# Altium PCB Protoboard.PcbDoc
Units mil, origin at the board's own origin, x right, y up, seen from the top; angles counter-clockwise.
Board outline 2900 x 3700 mil, 2 copper layers (Top Layer, Bottom Layer); 3 components, 87 nets, 543 pads, 10 vias.
Unrouted connection lines stored in the file: 84.
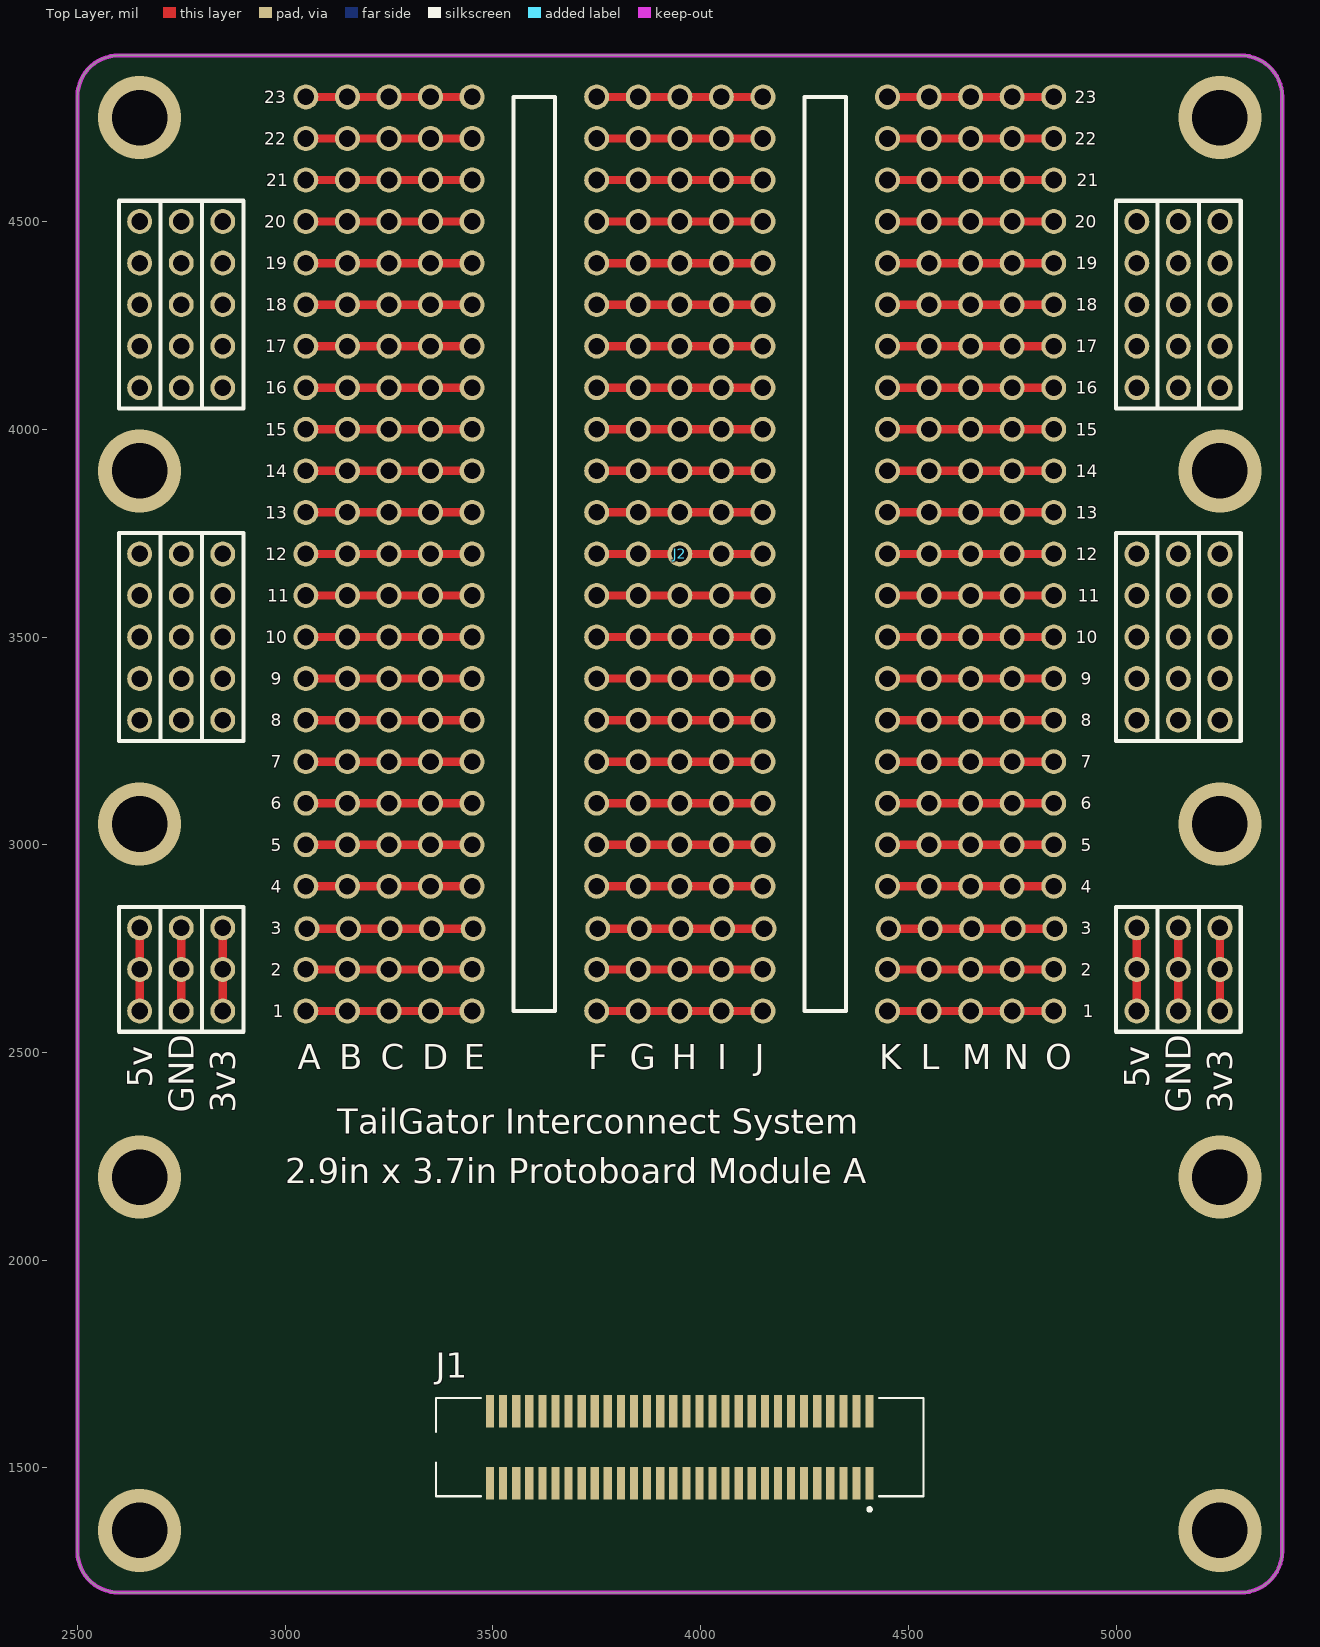
[diagram p0: Top Layer view]
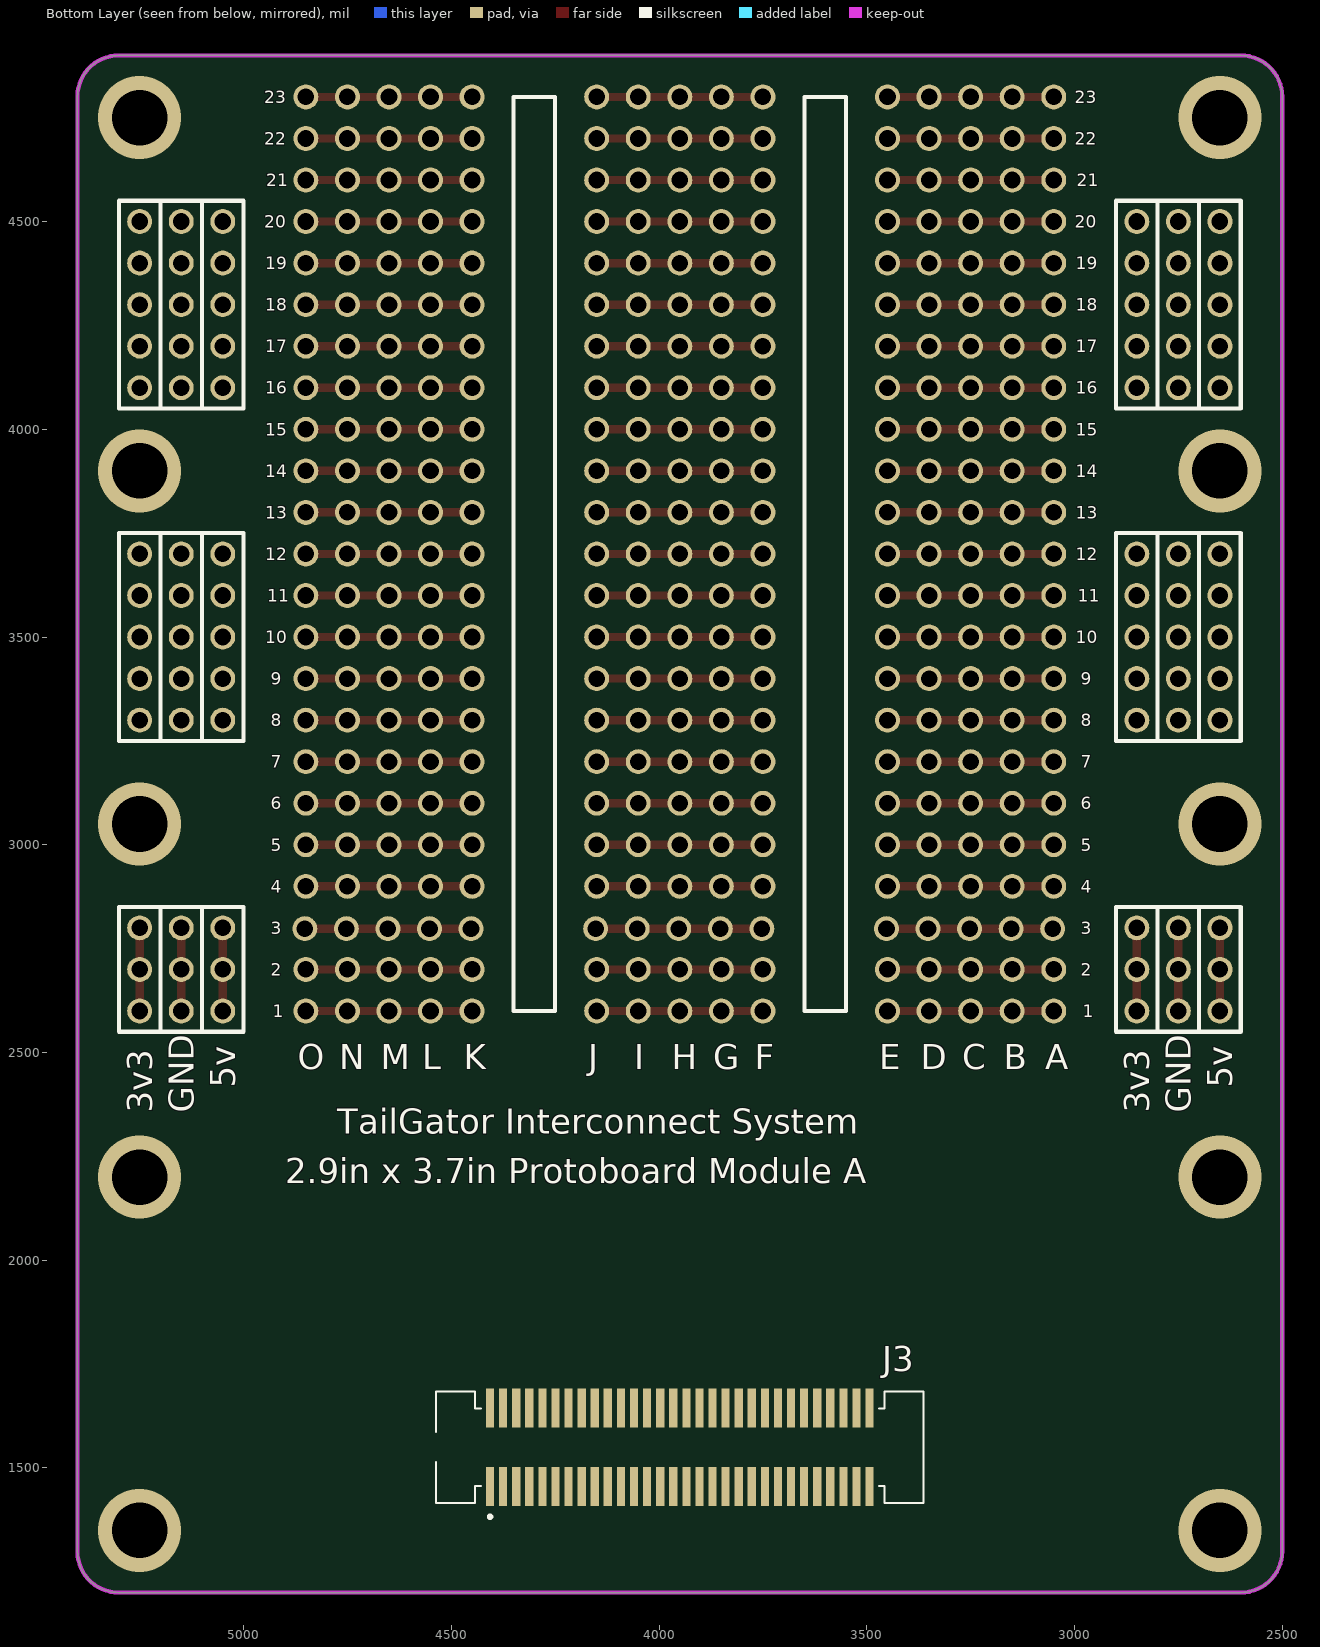
[diagram p1: Bottom Layer view, seen from below]

## Layer stack, top to bottom
Top Solder: solder mask 0.4, Solder Resist, Dk 3.5
Top Layer: signal copper 1.4
Dielectric 1: dielectric 12.6, FR-4, Dk 4.8
Bottom Layer: signal copper 1.4
Bottom Solder: solder mask 0.4, Solder Resist, Dk 3.5

## Board outline
2500,1300 2500,4800 cw(c2600,4800) 2600,4900 5300,4900 cw(c5300,4800) 5400,4800 5400,1300 cw(c5300,1300) 5300,1200 2600,1200 cw(c2600,1300)

## Design rules (kind name [scope] priority, off if disabled: settings)
Clearance [All] p1: gap=10 ignorepadtopadclearanceinfootprint=FALSE except(0: Arc-Hole Track-Hole SMDPad-Hole THPad-Hole Via-Hole Fill-Hole Poly-Hole Region-Hole Text-Hole)
DiffPairsRouting "Schematic Differential Pairs Routing" [InNetClass('CAN')] p1: maxlimit=10 minlimit=10 mostfreqgap=10 toplayer_minwidth=15 toplayer_maxwidth=15 toplayer_prefwidth=15 bottomlayer_minwidth=15 bottomlayer_maxwidth=15 bottomlayer_prefwidth=15 maxuncoupledlength=5
DiffPairsRouting [All] p2: maxlimit=10 minlimit=10 mostfreqgap=10 toplayer_minwidth=15 toplayer_maxwidth=15 toplayer_prefwidth=15 bottomlayer_minwidth=15 bottomlayer_maxwidth=15 bottomlayer_prefwidth=15 maxuncoupledlength=500
MatchedLengths "Schematic Matched Net Lengths" [InNetClass('CAN')] p1: tolerance=5 checknetsindiffpair=TRUE checkdiffpairvsdiffpair=FALSE checkxsignals=FALSE checkothers=FALSE
PolygonConnect [All] p1: connectstyle=Relief reliefconductorwidth=10 reliefentries=4 polygonreliefangle="90 Angle" airgapwidth=10
RoutingVias [All] p1: holewidth=28 width=50 viastyle="Through Hole" minholewidth=28 minwidth=50 maxholewidth=28 maxwidth=50
SolderMaskExpansion [All] p1: expansion=4 istentingtop=FALSE
Width Width_1 [All] p1: maxlimit=10 minlimit=10 preferedwidth=10
Width Proto_Width [All] p2: maxlimit=20 minlimit=10 preferedwidth=20 minimp=50.000000 maximp=50.000000 favimp=50.000000
29 further rules are at their usual default settings.

## Classes and differential pairs
net class "Protoboard Lines": +3V3 +5V G1R1 G1R2 G1R3 G1R4 G1R5 G1R6 G1R7 G1R8 G1R9 G1R10 G1R11 G1R12 G1R13 G1R14 G1R15 G1R16 G1R17 G1R18 G1R19 G1R20 G1R21 G1R23 G1R122 G2R1 G2R2 G2R3 G2R4 G2R5 G2R6 G2R7 G2R8 G2R9 G2R10 G2R11 G2R12 G2R13 G2R14 G2R15 G2R16 G2R17 G2R18 G2R19 G2R21 G2R22 G2R23 G3R1 G3R2 G3R3 G3R4 G3R5 G3R6 G3R7 G3R8 G3R9 G3R10 G3R11 G3R12 G3R13 G3R14 G3R15 G3R16 G3R17 G3R18 G3R19 G3R20 G3R21 G3R22 G3R23 GND
differential pair class CAN_LINES: CAN
net class CAN: CAN_N CAN_P
differential pair CAN: +CAN_P -CAN_N

## Components (designator, comment, footprint, x,y, rotation, side; value= is the part's Value field where it differs from the comment)
J1 "10144518-063802LF" AMPHENOL_10144518-063802LF 3950,1550 r180 top
J2 "RAILS" 75X95VIAS 3950,3100 r0 top
J3 "10144517-061802LF" AMPHENOL_10144517-061802LF 3950,1550 r0 bottom

## Footprints (in the part's own frame and the unit in brackets; to place one, negate y for a bottom-side part, rotate by r counter-clockwise, add the part's x,y. Pads: shape width x height; smd on the part's side, far side on the other; paste and mask are expansions set on the pad)
75X95VIAS [mil]
  round 60 hole 40: 1(-1300,-500) 1(-1300,-400) 1(-1300,-300) 1(1100,-500) 1(1100,-400) 1(1100,-300) 2(-1200,-500) 2(-1200,-400) 2(-1200,-300) 2(1200,-500) 2(1200,-400) 2(1200,-300) 3(-1100,-500) 3(-1100,-400) 3(-1100,-300) 3(1300,-500) 3(1300,-400) 3(1300,-300) G1R1(-900,-500) G1R1(-800,-500) G1R1(-700,-500) G1R1(-600,-500) G1R1(-500,-500) G1R2(-900,-400) G1R2(-800,-400) G1R2(-700,-400) G1R2(-600,-400) G1R2(-500,-400) G1R3(-897.5,-301.93) G1R3(-797.5,-301.93) G1R3(-697.5,-301.93) G1R3(-597.5,-301.93) G1R3(-497.5,-301.93) G1R4(-900,-200) G1R4(-800,-200) G1R4(-700,-200) G1R4(-600,-200) G1R4(-500,-200) G1R5(-900,-100) G1R5(-800,-100) G1R5(-700,-100) G1R5(-600,-100) G1R5(-500,-100) G1R6(-900,0) G1R6(-800,0) G1R6(-700,0) G1R6(-600,0) G1R6(-500,0) G1R7(-900,100) G1R7(-800,100) G1R7(-700,100) G1R7(-600,100) G1R7(-500,100) G1R8(-900,200) G1R8(-800,200) G1R8(-700,200) G1R8(-600,200) G1R8(-500,200) G1R9(-900,300) G1R9(-800,300) G1R9(-700,300) G1R9(-600,300) G1R9(-500,300) G1R10(-900,400) G1R10(-800,400) G1R10(-700,400) G1R10(-600,400) G1R10(-500,400) G1R11(-900,500) G1R11(-800,500) G1R11(-700,500) G1R11(-600,500) G1R11(-500,500) G1R12(-900,600) G1R12(-800,600) G1R12(-700,600) G1R12(-600,600) G1R12(-500,600) G1R13(-900,700) G1R13(-800,700) G1R13(-700,700) G1R13(-600,700) G1R13(-500,700) G1R14(-900,800) G1R14(-800,800) G1R14(-700,800) G1R14(-600,800) G1R14(-500,800) G1R15(-900,900) G1R15(-800,900) G1R15(-700,900) G1R15(-600,900) G1R15(-500,900) G1R16(-900,1000) G1R16(-800,1000) G1R16(-700,1000) G1R16(-600,1000) G1R16(-500,1000) G1R17(-900,1100) G1R17(-800,1100) G1R17(-700,1100) G1R17(-600,1100) G1R17(-500,1100) G1R18(-900,1200) G1R18(-800,1200) G1R18(-700,1200) G1R18(-600,1200) G1R18(-500,1200) G1R19(-900,1300) G1R19(-800,1300) G1R19(-700,1300) G1R19(-600,1300) G1R19(-500,1300) G1R20(-900,1400) G1R20(-800,1400) G1R20(-700,1400) G1R20(-600,1400) G1R20(-500,1400) G1R21(-900,1500) G1R21(-800,1500) G1R21(-700,1500) G1R21(-600,1500) G1R21(-500,1500) G1R22(-900,1600) G1R22(-800,1600) G1R22(-700,1600) G1R22(-600,1600) G1R22(-500,1600) G1R23(-900,1700) G1R23(-800,1700) G1R23(-700,1700) G1R23(-600,1700) G1R23(-500,1700) G2R1(-200,-500) G2R1(-100,-500) G2R1(0,-500) G2R1(100,-500) G2R1(200,-500) G2R2(-200,-400) G2R2(-100,-400) G2R2(0,-400) G2R2(100,-400) G2R2(200,-400) G2R3(-197.5,-301.93) G2R3(-97.5,-301.93) G2R3(2.5,-301.93) G2R3(102.5,-301.93) G2R3(202.5,-301.93) G2R4(-200,-200) G2R4(-100,-200) G2R4(0,-200) G2R4(100,-200) G2R4(200,-200) G2R5(-200,-100) G2R5(-100,-100) G2R5(0,-100) G2R5(100,-100) G2R5(200,-100) G2R6(-200,0) G2R6(-100,0) G2R6(0,0) G2R6(100,0) G2R6(200,0) G2R7(-200,100) G2R7(-100,100) G2R7(0,100) G2R7(100,100) G2R7(200,100) G2R8(-200,200) G2R8(-100,200) G2R8(0,200) G2R8(100,200) G2R8(200,200) G2R9(-200,300) G2R9(-100,300) G2R9(0,300) G2R9(100,300) G2R9(200,300) G2R10(-200,400) G2R10(-100,400) G2R10(0,400) G2R10(100,400) G2R10(200,400) G2R11(-200,500) G2R11(-100,500) G2R11(0,500) G2R11(100,500) G2R11(200,500) G2R12(-200,600) G2R12(-100,600) G2R12(0,600) G2R12(100,600) G2R12(200,600) G2R13(-200,700) G2R13(-100,700) G2R13(0,700) G2R13(100,700) G2R13(200,700) G2R14(-200,800) G2R14(-100,800) G2R14(0,800) G2R14(100,800) G2R14(200,800) G2R15(-200,900) G2R15(-100,900) G2R15(0,900) G2R15(100,900) G2R15(200,900) G2R16(-200,1000) G2R16(-100,1000) G2R16(0,1000) G2R16(100,1000) G2R16(200,1000) G2R17(-200,1100) G2R17(-100,1100) G2R17(0,1100) G2R17(100,1100) G2R17(200,1100) G2R18(-200,1200) G2R18(-100,1200) G2R18(0,1200) G2R18(100,1200) G2R18(200,1200) G2R19(-200,1300) G2R19(-100,1300) G2R19(0,1300) G2R19(100,1300) G2R19(200,1300) G2R20(-200,1400) G2R20(-100,1400) G2R20(0,1400) G2R20(100,1400) G2R20(200,1400) G2R21(-200,1500) G2R21(-100,1500) G2R21(0,1500) G2R21(100,1500) G2R21(200,1500) G2R22(-200,1600) G2R22(-100,1600) G2R22(0,1600) G2R22(100,1600) G2R22(200,1600) G2R23(-200,1700) G2R23(-100,1700) G2R23(0,1700) G2R23(100,1700) G2R23(200,1700) G3R1(500,-500) G3R1(600,-500) G3R1(700,-500) G3R1(800,-500) G3R1(900,-500) G3R2(500,-400) G3R2(600,-400) G3R2(700,-400) G3R2(800,-400) G3R2(900,-400) G3R3(502.5,-301.93) G3R3(602.5,-301.93) G3R3(702.5,-301.93) G3R3(802.5,-301.93) G3R3(902.5,-301.93) G3R4(500,-200) G3R4(600,-200) G3R4(700,-200) G3R4(800,-200) G3R4(900,-200) G3R5(500,-100) G3R5(600,-100) G3R5(700,-100) G3R5(800,-100) G3R5(900,-100) G3R6(500,0) G3R6(600,0) G3R6(700,0) G3R6(800,0) G3R6(900,0) G3R7(500,100) G3R7(600,100) G3R7(700,100) G3R7(800,100) G3R7(900,100) G3R8(500,200) G3R8(600,200) G3R8(700,200) G3R8(800,200) G3R8(900,200) G3R9(500,300) G3R9(600,300) G3R9(700,300) G3R9(800,300) G3R9(900,300) G3R10(500,400) G3R10(600,400) G3R10(700,400) G3R10(800,400) G3R10(900,400) G3R11(500,500) G3R11(600,500) G3R11(700,500) G3R11(800,500) G3R11(900,500) G3R12(500,600) G3R12(600,600) G3R12(700,600) G3R12(800,600) G3R12(900,600) G3R13(500,700) G3R13(600,700) G3R13(700,700) G3R13(800,700) G3R13(900,700) G3R14(500,800) G3R14(600,800) G3R14(700,800) G3R14(800,800) G3R14(900,800) G3R15(500,900) G3R15(600,900) G3R15(700,900) G3R15(800,900) G3R15(900,900) G3R16(500,1000) G3R16(600,1000) G3R16(700,1000) G3R16(800,1000) G3R16(900,1000) G3R17(500,1100) G3R17(600,1100) G3R17(700,1100) G3R17(800,1100) G3R17(900,1100) G3R18(500,1200) G3R18(600,1200) G3R18(700,1200) G3R18(800,1200) G3R18(900,1200) G3R19(500,1300) G3R19(600,1300) G3R19(700,1300) G3R19(800,1300) G3R19(900,1300) G3R20(500,1400) G3R20(600,1400) G3R20(700,1400) G3R20(800,1400) G3R20(900,1400) G3R21(500,1500) G3R21(600,1500) G3R21(700,1500) G3R21(800,1500) G3R21(900,1500) G3R22(500,1600) G3R22(600,1600) G3R22(700,1600) G3R22(800,1600) G3R22(900,1600) G3R23(500,1700) G3R23(600,1700) G3R23(700,1700) G3R23(800,1700) G3R23(900,1700) P1Ra1(-1300,200) P1Ra1(-1300,300) P1Ra1(-1300,400) P1Ra1(-1300,500) P1Ra1(-1300,600) P1Ra2(-1200,200) P1Ra2(-1200,300) P1Ra2(-1200,400) P1Ra2(-1200,500) P1Ra2(-1200,600) P1Ra3(-1100,200) P1Ra3(-1100,300) P1Ra3(-1100,400) P1Ra3(-1100,500) P1Ra3(-1100,600) P2Ra1(-1300,1000) P2Ra1(-1300,1100) P2Ra1(-1300,1200) P2Ra1(-1300,1300) P2Ra1(-1300,1400) P2Ra2(-1200,1000) P2Ra2(-1200,1100) P2Ra2(-1200,1200) P2Ra2(-1200,1300) P2Ra2(-1200,1400) P2Ra3(-1100,1000) P2Ra3(-1100,1100) P2Ra3(-1100,1200) P2Ra3(-1100,1300) P2Ra3(-1100,1400) P3Ra1(1100,200) P3Ra1(1100,300) P3Ra1(1100,400) P3Ra1(1100,500) P3Ra1(1100,600) P3Ra2(1200,200) P3Ra2(1200,300) P3Ra2(1200,400) P3Ra2(1200,500) P3Ra2(1200,600) P3Ra3(1300,200) P3Ra3(1300,300) P3Ra3(1300,400) P3Ra3(1300,500) P3Ra3(1300,600) P4Ra1(1100,1000) P4Ra1(1100,1100) P4Ra1(1100,1200) P4Ra1(1100,1300) P4Ra1(1100,1400) P4Ra2(1200,1000) P4Ra2(1200,1100) P4Ra2(1200,1200) P4Ra2(1200,1300) P4Ra2(1200,1400) P4Ra3(1300,1000) P4Ra3(1300,1100) P4Ra3(1300,1200) P4Ra3(1300,1300) P4Ra3(1300,1400)
  silkscreen extent -1350,-550 1350,1700
AMPHENOL_10144517-061802LF [mm]
  rect 0.5x2.4 smd: 1(11.6,2.4) 2(11.6,-2.4) 3(10.8,2.4) 4(10.8,-2.4) 5(10,2.4) 6(10,-2.4) 7(9.2,2.4) 8(9.2,-2.4) 9(8.4,2.4) 10(8.4,-2.4) 11(7.6,2.4) 12(7.6,-2.4) 13(6.8,2.4) 14(6.8,-2.4) 15(6,2.4) 16(6,-2.4) 17(5.2,2.4) 18(5.2,-2.4) 19(4.4,2.4) 20(4.4,-2.4) 21(3.6,2.4) 22(3.6,-2.4) 23(2.8,2.4) 24(2.8,-2.4) 25(2,2.4) 26(2,-2.4) 27(1.2,2.4) 28(1.2,-2.4) 29(0.4,2.4) 30(0.4,-2.4) 31(-0.4,2.4) 32(-0.4,-2.4) 33(-1.2,2.4) 34(-1.2,-2.4) 35(-2,2.4) 36(-2,-2.4) 37(-2.8,2.4) 38(-2.8,-2.4) 39(-3.6,2.4) 40(-3.6,-2.4) 41(-4.4,2.4) 42(-4.4,-2.4) 43(-5.2,2.4) 44(-5.2,-2.4) 45(-6,2.4) 46(-6,-2.4) 47(-6.8,2.4) 48(-6.8,-2.4) 49(-7.6,2.4) 50(-7.6,-2.4) 51(-8.4,2.4) 52(-8.4,-2.4) 53(-9.2,2.4) 54(-9.2,-2.4) 55(-10,2.4) 56(-10,-2.4) 57(-10.8,2.4) 58(-10.8,-2.4) 59(-11.6,2.4) 60(-11.6,-2.4)
  silkscreen extent -14.9,-3.4 14.9,4.35, body extent -14.9,-3 14.9,3, height 3.65
AMPHENOL_10144518-063802LF [mm]
  rect 0.5x2 smd: 1(-11.6,2.2) 2(-11.6,-2.2) 3(-10.8,2.2) 4(-10.8,-2.2) 5(-10,2.2) 6(-10,-2.2) 7(-9.2,2.2) 8(-9.2,-2.2) 9(-8.4,2.2) 10(-8.4,-2.2) 11(-7.6,2.2) 12(-7.6,-2.2) 13(-6.8,2.2) 14(-6.8,-2.2) 15(-6,2.2) 16(-6,-2.2) 17(-5.2,2.2) 18(-5.2,-2.2) 19(-4.4,2.2) 20(-4.4,-2.2) 21(-3.6,2.2) 22(-3.6,-2.2) 23(-2.8,2.2) 24(-2.8,-2.2) 25(-2,2.2) 26(-2,-2.2) 27(-1.2,2.2) 28(-1.2,-2.2) 29(-0.4,2.2) 30(-0.4,-2.2) 31(0.4,2.2) 32(0.4,-2.2) 33(1.2,2.2) 34(1.2,-2.2) 35(2,2.2) 36(2,-2.2) 37(2.8,2.2) 38(2.8,-2.2) 39(3.6,2.2) 40(3.6,-2.2) 41(4.4,2.2) 42(4.4,-2.2) 43(5.2,2.2) 44(5.2,-2.2) 45(6,2.2) 46(6,-2.2) 47(6.8,2.2) 48(6.8,-2.2) 49(7.6,2.2) 50(7.6,-2.2) 51(8.4,2.2) 52(8.4,-2.2) 53(9.2,2.2) 54(9.2,-2.2) 55(10,2.2) 56(10,-2.2) 57(10.8,2.2) 58(10.8,-2.2) 59(11.6,2.2) 60(11.6,-2.2)
  silkscreen extent -14.9,-3 14.9,3.9, body extent -14.9,-3 14.9,3, height 6.65

## Part data
J1: "CONN PLUG 60POS SMD GOLD", Supplier Part Number 1=609-5451-1-ND, Supplier 1=Digi-Key, System=Connector
J2: library part PROTORAIL1
J3: "CONN RCPT 60POS SMD GOLD", Supplier Part Number 1=609-5433-1-ND, Supplier 1=Digi-Key, System=Connector

## Via types
v1: diameter 200, hole 133.86, Top Layer to Bottom Layer, 10 vias

## Nets (pads, with @x,y where several pads share a name; then routed paths per layer and width w, separated by ;. In a path a pad name is that pad's centre, name@x,y a point inside that pad or via, vN(x,y) a via of type N, cw(c..) or ccw(c..) an arc to the next point about the centre after c; other vN are vias at no path point)
+3V3: J1.4 J1.6 J1.8 J1.32 J1.34 J1.53 J1.55 J1.57 J2.3 J3.4 J3.6 J3.8 J3.32 J3.34 J3.53 J3.55 J3.57 | length 400
  Top Layer w20: J2.3@2850,2600 2850,2700 J2.3@2850,2800 ; J2.3@5250,2600 5250,2700 J2.3@5250,2800
+5V: J1.3 J1.5 J1.7 J1.31 J1.33 J1.54 J1.56 J1.58 J2.1 J3.3 J3.5 J3.7 J3.31 J3.33 J3.54 J3.56 J3.58 | length 400
  Top Layer w20: J2.1@2650,2600 2650,2700 J2.1@2650,2800 ; J2.1@5050,2600 5050,2700 J2.1@5050,2800
CAN_N: J1.27 J3.27
CAN_P: J1.25 J3.25
G1R1: J2.G1R1 | length 400
  Top Layer w20: J2.G1R1@3050,2600 J2.G1R1@3450,2600
G1R2: J2.G1R2 | length 400
  Top Layer w20: J2.G1R2@3050,2700 J2.G1R2@3450,2700
G1R3: J2.G1R3 | length 400
  Top Layer w20: J2.G1R3@3052.5,2798.07 J2.G1R3@3452.5,2798.07
G1R4: J2.G1R4 | length 400
  Top Layer w20: J2.G1R4@3050,2900 J2.G1R4@3450,2900
G1R5: J2.G1R5 | length 400
  Top Layer w20: J2.G1R5@3050,3000 J2.G1R5@3450,3000
G1R6: J2.G1R6 | length 400
  Top Layer w20: J2.G1R6@3050,3100 J2.G1R6@3450,3100
G1R7: J2.G1R7 | length 400
  Top Layer w20: J2.G1R7@3050,3200 J2.G1R7@3450,3200
G1R8: J2.G1R8 | length 400
  Top Layer w20: J2.G1R8@3050,3300 J2.G1R8@3450,3300
G1R9: J2.G1R9 | length 400
  Top Layer w20: J2.G1R9@3050,3400 J2.G1R9@3450,3400
G1R10: J2.G1R10 | length 400
  Top Layer w20: J2.G1R10@3050,3500 J2.G1R10@3450,3500
G1R11: J2.G1R11 | length 400
  Top Layer w20: J2.G1R11@3050,3600 J2.G1R11@3450,3600
G1R12: J2.G1R12 | length 400
  Top Layer w20: J2.G1R12@3050,3700 J2.G1R12@3450,3700
G1R13: J2.G1R13 | length 400
  Top Layer w20: J2.G1R13@3050,3800 J2.G1R13@3450,3800
G1R14: J2.G1R14 | length 400
  Top Layer w20: J2.G1R14@3050,3900 J2.G1R14@3450,3900
G1R15: J2.G1R15 | length 400
  Top Layer w20: J2.G1R15@3050,4000 J2.G1R15@3450,4000
G1R16: J2.G1R16 | length 400
  Top Layer w20: J2.G1R16@3050,4100 J2.G1R16@3450,4100
G1R17: J2.G1R17 | length 400
  Top Layer w20: J2.G1R17@3050,4200 J2.G1R17@3450,4200
G1R18: J2.G1R18 | length 400
  Top Layer w20: J2.G1R18@3050,4300 J2.G1R18@3450,4300
G1R19: J2.G1R19 | length 400
  Top Layer w20: J2.G1R19@3050,4400 J2.G1R19@3450,4400
G1R20: J2.G1R20 | length 400
  Top Layer w20: J2.G1R20@3050,4500 J2.G1R20@3450,4500
G1R21: J2.G1R21 | length 400
  Top Layer w20: J2.G1R21@3050,4600 J2.G1R21@3450,4600
G1R23: J2.G1R23 | length 400
  Top Layer w20: J2.G1R23@3050,4800 J2.G1R23@3450,4800
G1R122: J2.G1R22 | length 400
  Top Layer w20: J2.G1R22@3050,4700 J2.G1R22@3450,4700
G2R1: J2.G2R1 | length 400
  Top Layer w20: J2.G2R1@3750,2600 J2.G2R1@4150,2600
G2R2: J2.G2R2 | length 400
  Top Layer w20: J2.G2R2@3750,2700 J2.G2R2@4150,2700
G2R3: J2.G2R3 | length 400
  Top Layer w20: J2.G2R3@3752.5,2798.07 J2.G2R3@4152.5,2798.07
G2R4: J2.G2R4 | length 400
  Top Layer w20: J2.G2R4@3750,2900 J2.G2R4@4150,2900
G2R5: J2.G2R5 | length 400
  Top Layer w20: J2.G2R5@3750,3000 J2.G2R5@4150,3000
G2R6: J2.G2R6 | length 400
  Top Layer w20: J2.G2R6@3750,3100 J2.G2R6@4150,3100
G2R7: J2.G2R7 | length 400
  Top Layer w20: J2.G2R7@3750,3200 J2.G2R7@4150,3200
G2R8: J2.G2R8 | length 400
  Top Layer w20: J2.G2R8@3750,3300 J2.G2R8@4150,3300
G2R9: J2.G2R9 | length 400
  Top Layer w20: J2.G2R9@3750,3400 J2.G2R9@4150,3400
G2R10: J2.G2R10 | length 400
  Top Layer w20: J2.G2R10@3750,3500 J2.G2R10@4150,3500
G2R11: J2.G2R11 | length 400
  Top Layer w20: J2.G2R11@3750,3600 J2.G2R11@4150,3600
G2R12: J2.G2R12 | length 400
  Top Layer w20: J2.G2R12@3750,3700 J2.G2R12@4150,3700
G2R13: J2.G2R13 | length 400
  Top Layer w20: J2.G2R13@3750,3800 J2.G2R13@4150,3800
G2R14: J2.G2R14 | length 400
  Top Layer w20: J2.G2R14@3750,3900 J2.G2R14@4150,3900
G2R15: J2.G2R15 | length 400
  Top Layer w20: J2.G2R15@3750,4000 J2.G2R15@4150,4000
G2R16: J2.G2R16 | length 400
  Top Layer w20: J2.G2R16@3750,4100 J2.G2R16@4150,4100
G2R17: J2.G2R17 | length 400
  Top Layer w20: J2.G2R17@3750,4200 J2.G2R17@4150,4200
G2R18: J2.G2R18 | length 400
  Top Layer w20: J2.G2R18@3750,4300 J2.G2R18@4150,4300
G2R19: J2.G2R19 | length 400
  Top Layer w20: J2.G2R19@3750,4400 J2.G2R19@4150,4400
G2R21: J2.G2R21 | length 400
  Top Layer w20: J2.G2R21@3750,4600 J2.G2R21@4150,4600
G2R22: J2.G2R22 | length 400
  Top Layer w20: J2.G2R22@3750,4700 J2.G2R22@4150,4700
G2R23: J2.G2R23 | length 400
  Top Layer w20: J2.G2R23@3750,4800 J2.G2R23@4150,4800
G3R1: J2.G3R1 | length 400
  Top Layer w20: J2.G3R1@4450,2600 J2.G3R1@4850,2600
G3R2: J2.G3R2 | length 400
  Top Layer w20: J2.G3R2@4450,2700 J2.G3R2@4850,2700
G3R3: J2.G3R3 | length 400
  Top Layer w20: J2.G3R3@4452.5,2798.07 J2.G3R3@4852.5,2798.07
G3R4: J2.G3R4 | length 400
  Top Layer w20: J2.G3R4@4450,2900 J2.G3R4@4850,2900
G3R5: J2.G3R5 | length 400
  Top Layer w20: J2.G3R5@4450,3000 J2.G3R5@4850,3000
G3R6: J2.G3R6 | length 400
  Top Layer w20: J2.G3R6@4450,3100 J2.G3R6@4850,3100
G3R7: J2.G3R7 | length 400
  Top Layer w20: J2.G3R7@4450,3200 J2.G3R7@4850,3200
G3R8: J2.G3R8 | length 400
  Top Layer w20: J2.G3R8@4450,3300 J2.G3R8@4850,3300
G3R9: J2.G3R9 | length 400
  Top Layer w20: J2.G3R9@4450,3400 J2.G3R9@4850,3400
G3R10: J2.G3R10 | length 400
  Top Layer w20: J2.G3R10@4450,3500 J2.G3R10@4850,3500
G3R11: J2.G3R11 | length 400
  Top Layer w20: J2.G3R11@4450,3600 J2.G3R11@4850,3600
G3R12: J2.G3R12 | length 400
  Top Layer w20: J2.G3R12@4450,3700 J2.G3R12@4850,3700
G3R13: J2.G3R13 | length 400
  Top Layer w20: J2.G3R13@4450,3800 J2.G3R13@4850,3800
G3R14: J2.G3R14 | length 400
  Top Layer w20: J2.G3R14@4450,3900 J2.G3R14@4850,3900
G3R15: J2.G3R15 | length 400
  Top Layer w20: J2.G3R15@4450,4000 J2.G3R15@4850,4000
G3R16: J2.G3R16 | length 400
  Top Layer w20: J2.G3R16@4450,4100 J2.G3R16@4850,4100
G3R17: J2.G3R17 | length 400
  Top Layer w20: J2.G3R17@4450,4200 J2.G3R17@4850,4200
G3R18: J2.G3R18 | length 400
  Top Layer w20: J2.G3R18@4450,4300 J2.G3R18@4850,4300
G3R19: J2.G3R19 | length 400
  Top Layer w20: J2.G3R19@4450,4400 J2.G3R19@4850,4400
G3R20: J2.G2R20 J2.G3R20 | length 800
  Top Layer w20: J2.G2R20@3750,4500 J2.G2R20@4150,4500 ; J2.G3R20@4450,4500 J2.G3R20@4850,4500
G3R21: J2.G3R21 | length 400
  Top Layer w20: J2.G3R21@4450,4600 J2.G3R21@4850,4600
G3R22: J2.G3R22 | length 400
  Top Layer w20: J2.G3R22@4450,4700 J2.G3R22@4850,4700
G3R23: J2.G3R23 | length 400
  Top Layer w20: J2.G3R23@4450,4800 J2.G3R23@4850,4800
GND: J1.1 J1.2 J1.9 J1.10 J1.23 J1.24 J1.29 J1.30 J1.35 J1.36 J1.41 J1.42 J1.51 J1.52 J1.59 J1.60 J2.2 J3.1 J3.2 J3.9 J3.10 J3.23 J3.24 J3.29 J3.30 J3.35 J3.36 J3.41 J3.42 J3.51 J3.52 J3.59 J3.60 | length 400
  Top Layer w20: J2.2@2750,2600 2750,2700 J2.2@2750,2800 ; J2.2@5150,2600 5150,2700 J2.2@5150,2800
GNDDetect: J1.13 J3.13
JnRST: J1.12 J3.12
JTCK/SWDCLK: J1.19 J3.19
JTDI: J1.15 J3.15
JTDO/SWO: J1.17 J3.17
JTMS/SWDIO: J1.21 J3.21
TRACECLK: J1.14 J3.14
TRD0: J1.16 J3.16
TRD1: J1.18 J3.18
TRD2: J1.20 J3.20
TRD3: J1.22 J3.22
USB_D+: J1.38 J3.38
USB_D-: J1.40 J3.40
VREF: J1.11 J3.11
pads on no net: J1.26 J1.28 J1.37 J1.39 J1.43 J1.44 J1.45 J1.46 J1.47 J1.48 J1.49 J1.50 J2.P1Ra1 J2.P1Ra2 J2.P1Ra3 J2.P2Ra1 J2.P2Ra2 J2.P2Ra3 J2.P3Ra1 J2.P3Ra2 J2.P3Ra3 J2.P4Ra1 J2.P4Ra2 J2.P4Ra3 J3.26 J3.28 J3.37 J3.39 J3.43 J3.44 J3.45 J3.46 J3.47 J3.48 J3.49 J3.50
copper on no net:
  other v1: 2650,1350 5250,1350 2650,2200 5250,2200 2650,3050 5250,3050 2650,3900 5250,3900 2650,4750 5250,4750

## Keep-outs
Keep-Out Layer:
  the board outline again, w10

## Silkscreen, mask and mechanical layers (free items; w line width, h text height)
Mechanical 1:
  lines w10: 2500,4600 5400,4600 ; 3950,1450 3950,5150

## Text inside footprints (layer, text, board x,y; h text height)
J2: Top Overlay "1" at 2970,2585 h30; Top Overlay "10" at 2952.51,3485 h30; Top Overlay "5" at 2965,2985 h30; Top Overlay "7" at 2965,3185 h30; Top Overlay "6" at 2965,3085 h30; Top Overlay "4" at 2965,2885 h30; Top Overlay "3" at 2965,2785 h30; Top Overlay "2" at 2965,2685 h30; Top Overlay "8" at 2965,3285 h30; Top Overlay "9" at 2965,3385 h30; Top Overlay "11" at 2957.51,3585 h30; Top Overlay "12" at 2952.51,3685 h30; Top Overlay "13" at 2952.51,3785 h30; Top Overlay "14" at 2952.51,3885 h30; Top Overlay "15" at 2952.51,3985 h30; Top Overlay "16" at 2952.51,4085 h30; Top Overlay "17" at 2952.51,4185 h30; Top Overlay "18" at 2952.51,4285 h30; Top Overlay "19" at 2952.51,4385 h30; Top Overlay "20" at 2950.01,4485 h30; Top Overlay "23" at 2950.01,4785 h30; Top Overlay "21" at 2955.01,4585 h30; Top Overlay "22" at 2950.01,4685 h30; Top Overlay "23" at 4900.01,4785 h30; Top Overlay "22" at 4900.01,4685 h30; Top Overlay "21" at 4905.01,4585 h30; Top Overlay "20" at 4900.01,4485 h30; Top Overlay "19" at 4902.51,4385 h30; Top Overlay "18" at 4902.51,4285 h30; Top Overlay "17" at 4902.51,4185 h30; Top Overlay "16" at 4902.51,4085 h30; Top Overlay "15" at 4902.51,3985 h30; Top Overlay "14" at 4902.51,3885 h30; Top Overlay "13" at 4902.51,3785 h30; Top Overlay "12" at 4902.51,3685 h30; Top Overlay "11" at 4907.51,3585 h30; Top Overlay "10" at 4902.51,3485 h30; Top Overlay "9" at 4915,3385 h30; Top Overlay "8" at 4915,3285 h30; Top Overlay "7" at 4915,3185 h30; Top Overlay "6" at 4915,3085 h30; Top Overlay "5" at 4915,2985 h30; Top Overlay "4" at 4915,2885 h30; Top Overlay "3" at 4915,2785 h30; Top Overlay "1" at 4920,2585 h30; Top Overlay "2" at 4915,2685 h30; Top Overlay "2.9in x 3.7in Protoboard Module A" at 3000.31,2185 h60; Top Overlay "TailGator Interconnect System" at 3125.27,2304.99 h60; Top Overlay "3v3" at 5279.99,2355.05 h60 r90; Top Overlay "GND" at 5180,2355.06 h60 r90; Top Overlay "5v" at 5080,2415.04 h60 r90; Top Overlay "5v" at 2680,2415.03 h60 r90; Top Overlay "3v3" at 2880,2355.05 h60 r90; Top Overlay "GND" at 2780,2355.05 h60 r90; Top Overlay "E" at 3430.01,2460 h60; Top Overlay "D" at 3330.01,2460 h60; Top Overlay "C" at 3230.01,2460 h60; Top Overlay "A" at 3030.01,2460 h60; Top Overlay "O" at 4830.01,2460 h60; Top Overlay "N" at 4730.01,2460 h60; Top Overlay "M" at 4630.01,2460 h60; Top Overlay "L" at 4530.01,2460 h60; Top Overlay "K" at 4430.01,2460 h60; Top Overlay "I" at 4040,2460 h60; Top Overlay "H" at 3930.01,2460 h60; Top Overlay "G" at 3830.01,2460 h60; Top Overlay "F" at 3730.01,2460 h60; Top Overlay "J" at 4130.01,2460 h60; Top Overlay "B" at 3130.01,2460 h60; Bottom Overlay "1" at 4930,2585 h30; Bottom Overlay "10" at 4947.49,3485 h30; Bottom Overlay "5" at 4935,2985 h30; Bottom Overlay "7" at 4935,3185 h30; Bottom Overlay "6" at 4935,3085 h30; Bottom Overlay "4" at 4935,2885 h30; Bottom Overlay "3" at 4935,2785 h30; Bottom Overlay "2" at 4935,2685 h30; Bottom Overlay "8" at 4935,3285 h30; Bottom Overlay "9" at 4935,3385 h30; Bottom Overlay "11" at 4942.49,3585 h30; Bottom Overlay "12" at 4947.49,3685 h30; Bottom Overlay "13" at 4947.49,3785 h30; Bottom Overlay "14" at 4947.49,3885 h30; Bottom Overlay "15" at 4947.49,3985 h30; Bottom Overlay "16" at 4947.49,4085 h30; Bottom Overlay "17" at 4947.49,4185 h30; Bottom Overlay "18" at 4947.49,4285 h30; Bottom Overlay "19" at 4947.49,4385 h30; Bottom Overlay "20" at 4949.99,4485 h30; Bottom Overlay "23" at 4949.99,4785 h30; Bottom Overlay "21" at 4944.99,4585 h30; Bottom Overlay "22" at 4949.99,4685 h30; Bottom Overlay "23" at 2999.99,4785 h30; Bottom Overlay "22" at 2999.99,4685 h30; Bottom Overlay "21" at 2994.99,4585 h30; Bottom Overlay "20" at 2999.99,4485 h30; Bottom Overlay "19" at 2997.49,4385 h30; Bottom Overlay "18" at 2997.49,4285 h30; Bottom Overlay "17" at 2997.49,4185 h30; Bottom Overlay "16" at 2997.49,4085 h30; Bottom Overlay "15" at 2997.49,3985 h30; Bottom Overlay "14" at 2997.49,3885 h30; Bottom Overlay "13" at 2997.49,3785 h30; Bottom Overlay "12" at 2997.49,3685 h30; Bottom Overlay "11" at 2992.49,3585 h30; Bottom Overlay "10" at 2997.49,3485 h30; Bottom Overlay "9" at 2985,3385 h30; Bottom Overlay "8" at 2985,3285 h30; Bottom Overlay "7" at 2985,3185 h30; Bottom Overlay "6" at 2985,3085 h30; Bottom Overlay "5" at 2985,2985 h30; Bottom Overlay "4" at 2985,2885 h30; Bottom Overlay "3" at 2985,2785 h30; Bottom Overlay "1" at 2980,2585 h30; Bottom Overlay "2" at 2985,2685 h30; Bottom Overlay "2.9in x 3.7in Protoboard Module A" at 4899.69,2185 h60; Bottom Overlay "TailGator Interconnect System" at 4774.73,2304.99 h60; Bottom Overlay "5v" at 2620.01,2415.03 h60 r270; Bottom Overlay "GND" at 2720,2355.06 h60 r270; Bottom Overlay "3v3" at 2820,2355.06 h60 r270; Bottom Overlay "3v3" at 5220,2355.05 h60 r270; Bottom Overlay "5v" at 5020,2415.03 h60 r270; Bottom Overlay "GND" at 5120,2355.05 h60 r270; Bottom Overlay "K" at 4469.99,2460 h60; Bottom Overlay "L" at 4569.99,2460 h60; Bottom Overlay "M" at 4669.99,2460 h60; Bottom Overlay "O" at 4869.99,2460 h60; Bottom Overlay "A" at 3069.99,2460 h60; Bottom Overlay "B" at 3169.99,2460 h60; Bottom Overlay "C" at 3269.99,2460 h60; Bottom Overlay "D" at 3369.99,2460 h60; Bottom Overlay "E" at 3469.99,2460 h60; Bottom Overlay "G" at 3869.99,2460 h60; Bottom Overlay "H" at 3969.99,2460 h60; Bottom Overlay "I" at 4060,2460 h60; Bottom Overlay "J" at 4169.99,2460 h60; Bottom Overlay "F" at 3769.99,2460 h60; Bottom Overlay "N" at 4769.99,2460 h60